# Altium PCB PCB1.PcbDoc
Units mil, origin at the board's own origin, x right, y up, seen from the top; angles counter-clockwise.
Board outline 6000 x 4000 mil, 2 copper layers (Top Layer, Bottom Layer); 8 components, 13 nets, 45 pads, 0 vias.
Unrouted connection lines stored in the file: 2.
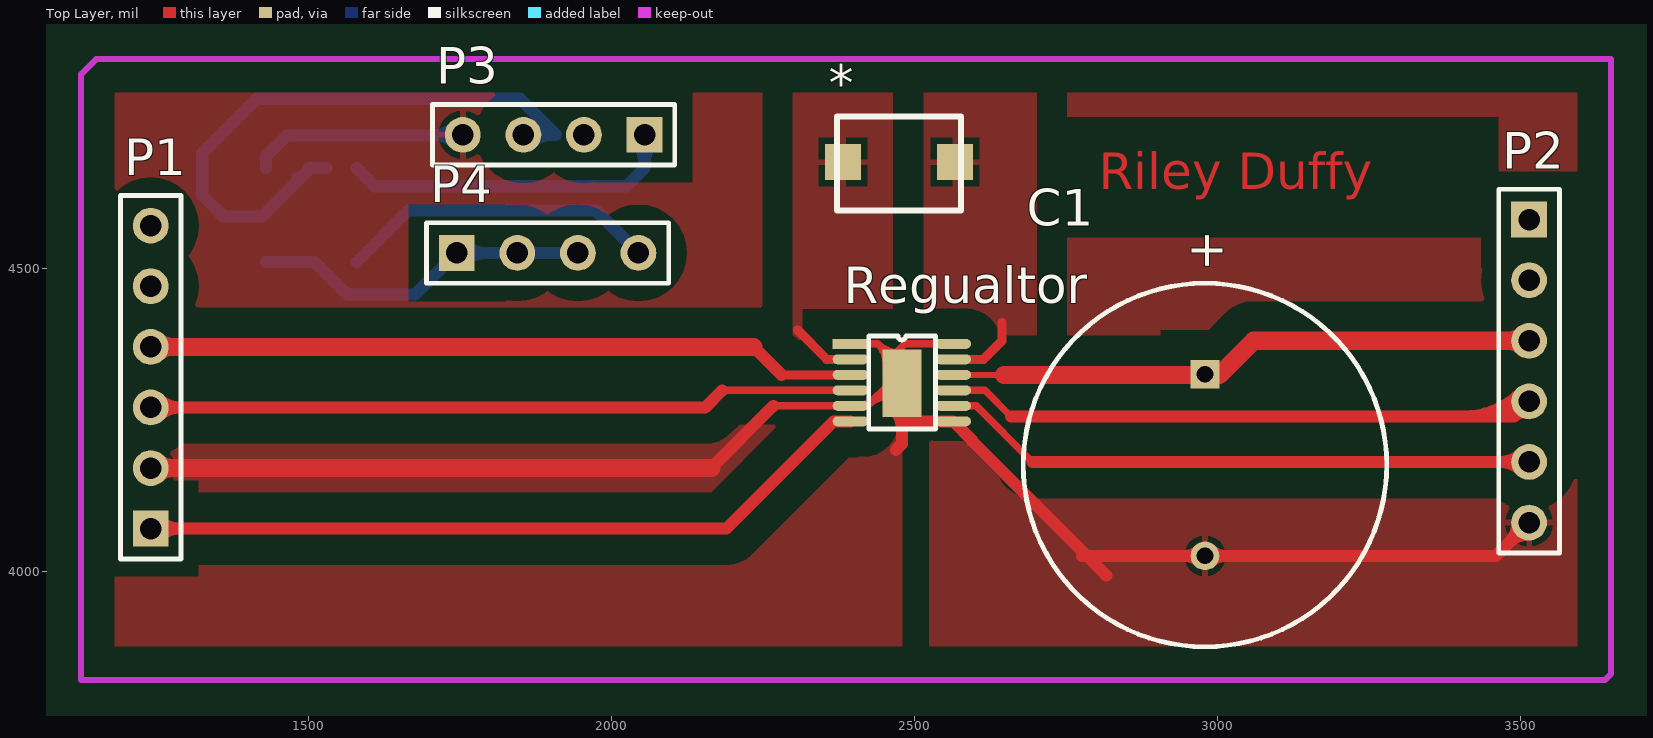
[diagram p0: Top Layer view]
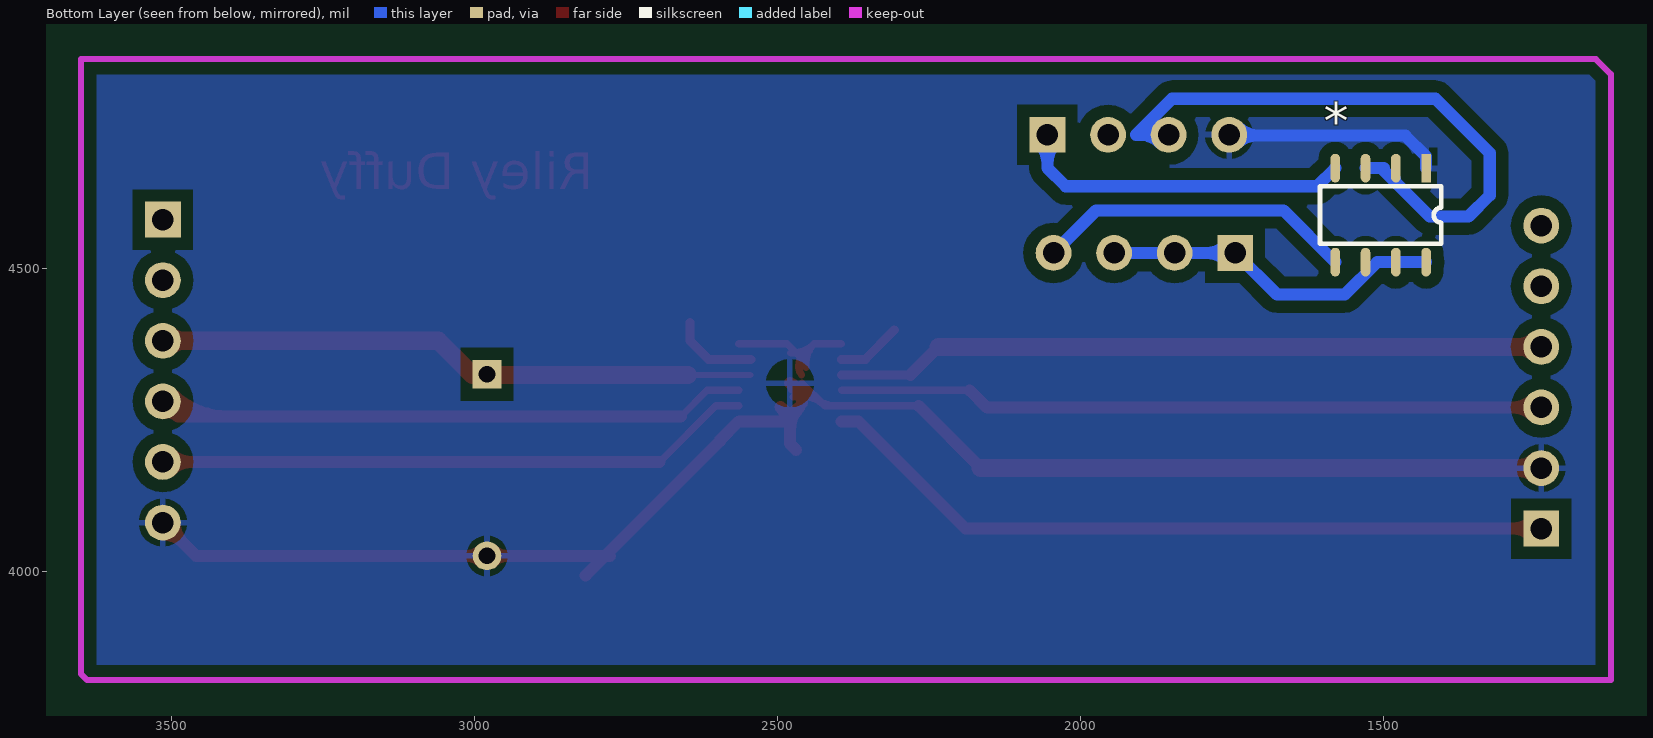
[diagram p1: Bottom Layer view, seen from below]

## Layer stack, top to bottom
Top Layer: signal copper 1.4
Dielectric: dielectric 12.6, FR-4, Dk 4.8
Bottom Layer: signal copper 1.4

## Board outline
1000,1000 7000,1000 7000,5000 1000,5000

## Design rules (kind name [scope] priority, off if disabled: settings)
Clearance Clearance_1 [OnLayer('Bottom Layer')] p1: gap=20
Clearance PolyGon [InPolygon] p2: gap=50
Clearance [All] p3: gap=7
PolygonConnect [All] p1: connectstyle=Relief reliefconductorwidth=10 reliefentries=4 polygonreliefangle="90 Angle" airgapwidth=10
RoutingLayers [All] p1: top layer_v5=TRUE bottom layer_v5=FALSE
RoutingVias [All] p1: holewidth=28 width=50 viastyle="Through Hole" minholewidth=28 minwidth=50 maxholewidth=28 maxwidth=50
SilkscreenOverComponentPads [All] p1: minsilkscreentomaskgap=10
SolderMaskExpansion [All] p1: expansion=4
Width VCC_Width [InNet('VIN','VOUT')] p1: maxlimit=40 minlimit=10 preferedwidth=30
Width [All] p2: maxlimit=30 minlimit=10 preferedwidth=20
26 further rules are at their usual default settings.

## Classes and differential pairs
component class Regulator: * C1 P1 P2 P3 P4 Regualtor

## Components (designator, comment, footprint, x,y, rotation, side; value= is the part's Value field where it differs from the comment)
* "Inductor" INDUCTOR 2475,4675 r0 top
* "PI5PD2068" "SOP8 - DUPLICATE" 1430,4665 r270 bottom
C1 "Cap Pol1" RB7.6-15 2980,4175 r90 top
P1 "Header 6" HDR1X6 1240,4070 r90 top
P2 "Header 6" HDR1X6 3515,4580 r270 top
P3 "Header 4" HDR1X4 2055,4720 r180 top
P4 "Header 4" HDR1X4 1745,4525 r0 top
Regualtor "Buck-Boost" "MSOP12W - duplicate" 2395,4375 r0 top

## Footprints (in the part's own frame and the unit in brackets; to place one, negate y for a bottom-side part, rotate by r counter-clockwise, add the part's x,y. Pads: shape width x height; smd on the part's side, far side on the other; paste and mask are expansions set on the pad)
HDR1X4 [mm] "Connector; Header; 4 Position"
  rect 1.5x1.5 hole 0.9: 1(0,0)
  round 1.5 hole 0.9: 2(2.54,0) 3(5.08,0) 4(7.62,0)
  silkscreen extent -1.27,-1.27 8.89,1.27
HDR1X6 [mm] "Connector; Header; 6 Position"
  rect 1.5x1.5 hole 0.9: 1(0,0)
  round 1.5 hole 0.9: 2(2.54,0) 3(5.08,0) 4(7.62,0) 5(10.16,0) 6(12.7,0)
  silkscreen extent -1.27,-1.27 13.97,1.27
INDUCTOR [mil]
  rect 60x60 smd: 1(-92.5,0) 2(92.5,0)
  silkscreen extent -102,-80 102,75
"MSOP12W - duplicate" [mm]
  rect 1.5x0.42 smd: 1(0,0)
  oval 1.5x0.42 smd: 2(0,-0.65) 3(0,-1.3) 4(0,-1.95) 5(0,-2.6) 6(0,-3.25) 7(4.3,-3.25) 8(4.3,-2.6) 9(4.3,-1.95) 10(4.3,-1.3) 11(4.3,-0.65) 12(4.3,0)
  rect 1.65x2.845 smd: 13(2.159,-1.651)
  silkscreen extent 0.76,-3.58 3.56,0.33
RB7.6-15 [mm] "Polarized Capacitor (Radial); 2 Leads"
  rect 1.2x1.2 hole 0.7: 1(3.81,0)
  round 1.2 hole 0.7: 2(-3.81,0)
  silkscreen extent -7.62,-7.62 7.62,7.62
"SOP8 - DUPLICATE" [mm]
  rect 1.2x0.406 smd: 1(0,0)
  oval 1.2x0.406 smd: 2(0,-1.27) 3(0,-2.54) 4(0,-3.81) 5(3.94,-3.81) 6(3.94,-2.54) 7(3.94,-1.27) 8(3.94,0)
  silkscreen extent 0.76,-4.45 3.17,0.63

## Part data
C1: "Polarized Capacitor (Radial)"
P1 P2: "Header, 6-Pin"
P3 P4: "Header, 4-Pin"
Regualtor: library part LTC3127

## Nets (pads, with @x,y where several pads share a name; then routed paths per layer and width w, separated by ;. In a path a pad name is that pad's centre, name@x,y a point inside that pad or via, vN(x,y) a via of type N, cw(c..) or ccw(c..) an arc to the next point about the centre after c; other vN are vias at no path point)
Net*_2: *.2@1480,4665 *.3 P3.2 P3.3 | length 1111
  Bottom Layer w20: 1477.48,4638.44 ccw(c1466.55,4649.37) *.2@1482.01,4649.37 ; *.3 1500,4665 1500,4660.96 1424.04,4585 1360,4585 1325,4620 1325,4690 1414.53,4779.53 1849.53,4779.53 1909.06,4720 P3.3 ; P3.3@1868.81,4706.19 cw(c1902.14,4672.86) 1902.14,4720 cw(c1902.14,4767.14) P3.3@1868.81,4733.81
Net*_4: *.4 P3.1 | length 628.9
  Bottom Layer w20: *.4 1610,4635 2025,4635 2055,4665 P3.1 ; P3.1@2041.19,4706.19 cw(c2007.86,4672.86) 2055,4672.86 cw(c2102.14,4672.86) P3.1@2068.81,4706.19
Net*_5: *.5 P4.4 | length 529.3
  Bottom Layer w20: *.5 1665.12,4595 1975,4595 P4.4
Net*_6: *.6 *.7 *.8 P4.1 P4.2 P4.3 | length 639.7
  Bottom Layer w20: *.8 *.7 1510.64,4509.88 1564.26,4456.26 1676.26,4456.26 P4.1 P4.2 P4.3 ; P4.1@1758.81,4511.19 cw(c1792.14,4477.86) 1792.14,4525 cw(c1792.14,4572.14) P4.1@1758.81,4538.81
NetP1_1: P1.1 Regualtor.6 | length 1302.4
  Top Layer w20: P1.1 2190,4070 2367.05,4247.05 Regualtor.6 ; P1.1@1253.81,4056.19 cw(c1287.14,4022.86) 1287.14,4070 cw(c1287.14,4117.14) P1.1@1253.81,4083.81
NetP1_3: P1.3 Regualtor.4 | length 1240.7
  Top Layer w12: 2183.23,4298.23 Regualtor.4
  Top Layer w20: P1.3 2155,4270 2183.23,4298.23 ; P1.3@1253.81,4256.19 cw(c1287.14,4222.86) 1287.14,4270 cw(c1287.14,4317.14) P1.3@1253.81,4283.81
NetP2_4: P2.4 Regualtor.9 | length 1194.1
  Top Layer w12: Regualtor.9 2616.77,4298.23 2660,4255
  Top Layer w20: 2660,4255 3490,4255 ; 3407.5,4255 ccw(c3407.5,4387.5) P2.4@3501.19,4293.81 ; 3455.79,4255 ccw(c3455.79,4339.21) P2.4@3515.33,4279.67 ; P2.4@3495.96,4275.66 cw(c3474.28,4270.73) 3490,4255 ; P2.4@3510.66,4260.96 ccw(c3505.73,4239.28) 3490,4255 ; P2.4 3490,4255
NetP2_5: P2.5 Regualtor.8 | length 1063.1
  Top Layer w12: Regualtor.8 2602.36,4272.64 2695,4180
  Top Layer w20: 2695,4180 P2.5 ; P2.5@3501.19,4166.19 ccw(c3467.86,4132.86) 3467.86,4180 ccw(c3467.86,4227.14) P2.5@3501.19,4193.81
PGRND: *.1@1430,4665 C1.2 P1.2 P2.6 P3.4 Regualtor.1 Regualtor.5 Regualtor.7 Regualtor.12 Regualtor.13 | length 3904.5
  Top Layer w12: 2267.64,4272.64 Regualtor.5@2422.64,4272.64 ; Regualtor.1 2440,4375 ; Regualtor.5@2416.26,4274.91 ccw(c2416.26,4295.78) 2431.02,4281.02 ; 2437.74,4287.74 cw(c2467.37,4258.1) Regualtor.13@2477.28,4298.83 ; Regualtor.13@2453.67,4336.33 ccw(c2406.36,4341.36) 2440,4375 ; Regualtor.13@2457.76,4357.24 cw(c2438.47,4337.94) Regualtor.13@2465.6,4335.06 ; Regualtor.13@2460,4310 Regualtor.5@2422.64,4272.64 ; Regualtor.13@2461.01,4323.84 ccw(c2443.68,4336.46) Regualtor.13@2464.86,4339.79 ; Regualtor.13@2474.45,4287.17 ccw(c2461.47,4233.81) Regualtor.5@2422.64,4272.64 ; Regualtor.13@2478.78,4359.98 cw(c2476.4,4411.4) 2440,4375 ; Regualtor.12 2485,4375 2460,4350 2460,4355 2440,4375
  Top Layer w20: 2165,4170 2267.64,4272.64 ; Regualtor.13@2460,4277.39 cw(c2497.51,4277.39) Regualtor.13@2479.76,4310.44 ; Regualtor.13@2464.1,4270.58 cw(c2425.73,4232.2) 2480,4232.2 cw(c2534.27,4232.2) Regualtor.13@2495.9,4270.58 ; 2470,4200 2480,4210 2480,4247.05 ; 2776.82,4025 3460,4025 P2.6 ; 2817.05,3992.95 2595,4215 2595,4216.34 Regualtor.7 2480,4247.05 ; C1.2@2970.37,4015.37 ccw(c2947.11,3992.11) 2947.11,4025 ccw(c2947.11,4057.89) C1.2@2970.37,4034.63 ; C1.2@2989.63,4015.37 cw(c3012.89,3992.11) 3012.89,4025 cw(c3012.89,4057.89) C1.2@2989.63,4034.63 ; P2.6@3495.47,4080 cw(c3448.33,4080) 3481.66,4046.66 cw(c3515,4013.33) P2.6@3515,4060.47 ; Regualtor.13@2468.55,4267.13 cw(c2456.67,4247.05) 2480,4247.05 ; Regualtor.13@2468.55,4267.13 cw(c2456.67,4247.05) 2480,4247.05 ; Regualtor.13@2468.55,4267.13 cw(c2456.67,4247.05) 2480,4247.05 ; 2480,4247.05 cw(c2503.33,4247.05) Regualtor.13@2491.45,4267.13 ; 2480,4247.05 cw(c2503.33,4247.05) Regualtor.13@2491.45,4267.13 ; 2480,4247.05 cw(c2503.33,4247.05) Regualtor.13@2491.45,4267.13
  Top Layer w30: P1.2 2165,4170 ; P1.2@1250.27,4159.73 cw(c1275.07,4134.93) 1275.07,4170 cw(c1275.07,4205.07) P1.2@1250.27,4180.27
  Bottom Layer w20: *.1@1430,4665 1430,4684.36 1464.26,4718.62 1753.62,4718.62 P3.4 ; 1704.53,4718.62 ccw(c1704.53,4770.47) P3.4@1741.19,4733.81 ; 1711.18,4718.62 cw(c1711.18,4676.18) P3.4@1741.19,4706.19
SW1: *.1@2382.5,4675 Regualtor.2 | length 107.6
  Top Layer w15: 2307.87,4397.87 2356.06,4349.67 ; 2355.59,4349.41 Regualtor.2
SW2: *.2@2567.5,4675 Regualtor.11 | length 143.1
  Top Layer w15: Regualtor.11@2544.61,4349.41 2614.41,4349.41 2645,4380 2645,4410
VIN: P1.4 Regualtor.3 | length 1229.2
  Top Layer w15: 2281.18,4323.82 Regualtor.3
  Top Layer w20: 2235,4370 2281.18,4323.82
  Top Layer w30: P1.4 2235,4370 ; P1.4@1250.27,4359.73 cw(c1275.07,4334.93) 1275.07,4370 cw(c1275.07,4405.07) P1.4@1250.27,4380.27
VOUT: C1.1 P2.3 Regualtor.10 | length 1087.4
  Top Layer w10: Regualtor.10@2545,4323.82 2648.82,4323.82
  Top Layer w30: 2648.82,4323.82 2875,4323.82 3003.82,4323.82 3060,4380 P2.3 ; 2956.33,4323.82 ccw(c2956.33,4348.67) C1.1@2973.9,4331.1 ; C1.1@2986.1,4331.1 ccw(c3003.67,4348.67) 3003.67,4323.82 ; P2.3@3504.73,4369.73 ccw(c3479.93,4344.93) 3479.93,4380 ccw(c3479.93,4415.07) P2.3@3504.73,4390.27
pads on no net: P1.5 P1.6 P2.1 P2.2

## Polygon pours and split planes (outlines as drawn)
PGRND on Bottom Layer "Bottom" (solid, pour order 9): 1125,4850 1125,3820 3650,3820 3650,4845 3645,4850 1125,4850
PGRND on Top Layer "Top" (solid, pour order 22): 1175,4775 1175,3850 1200,3875 2455,3875 2455,4775 2460,4780
PGRND on Top Layer "Top" (solid, pour order 28): 1145,4800 1145,3850 2469.61,3850 2480,3860 2480,4800
PGRND on Top Layer "Top" (solid, pour order 34): 2524.92,4800 2524.92,3855 2529.81,3850 3625,3850 3625,4800
SW2 on Top Layer "Top" (solid, pour order 18): 2500,4800 2500,4320 2720,4320 2702.4,4330 2702.4,4800
SW1 on Top Layer "Top" (solid, pour order 16): 2300,4800 2300,4360 2465,4360 2465,4795.37 2459.11,4800

## Keep-outs
Keep-Out Layer:
  lines w10: 1125,3820 1125,3850 1125,4820 1150,4845 3650,4845 3650,3830 3640,3820 1125,3820

## Other copper
Top Layer:
  text "Riley Duffy" at 2805,4630 h60

## Text inside footprints (layer, text, board x,y; h text height)
C1: Top Overlay "+" at 3009.01,4495.15 h59.06 r90